# Altium PCB PMW3329_Connector.PcbDoc
Units mm, origin at the board's own origin, x right, y up, seen from the top; angles counter-clockwise.
Board outline 22.5 x 22.5 mm, 2 copper layers (Top Layer, Bottom Layer); 3 components, 9 nets, 24 pads, 0 vias.
Unrouted connection lines stored in the file: 13.
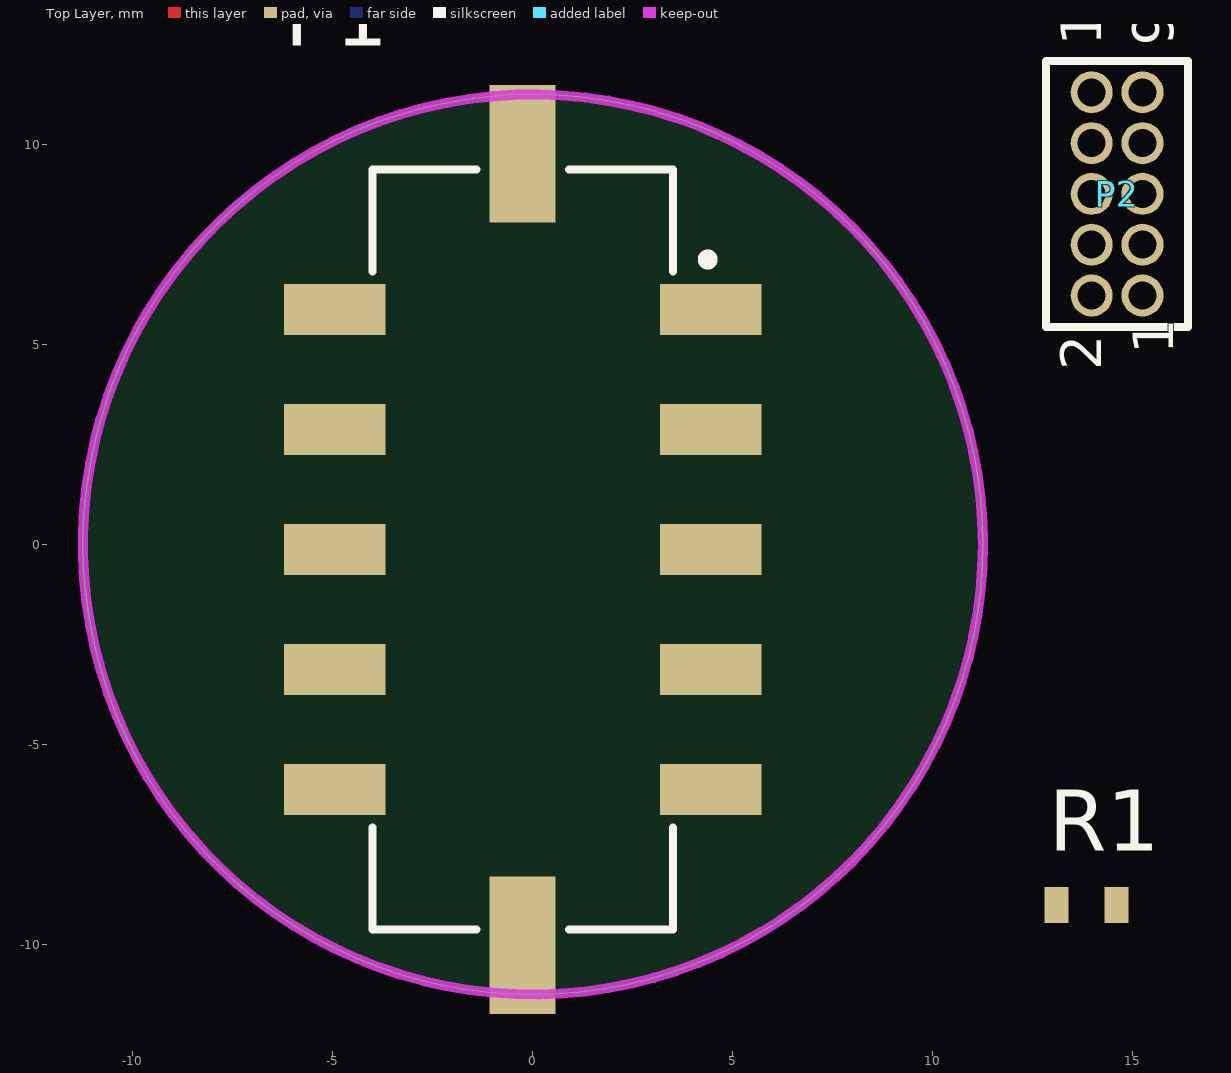
[diagram p0: Top Layer view]
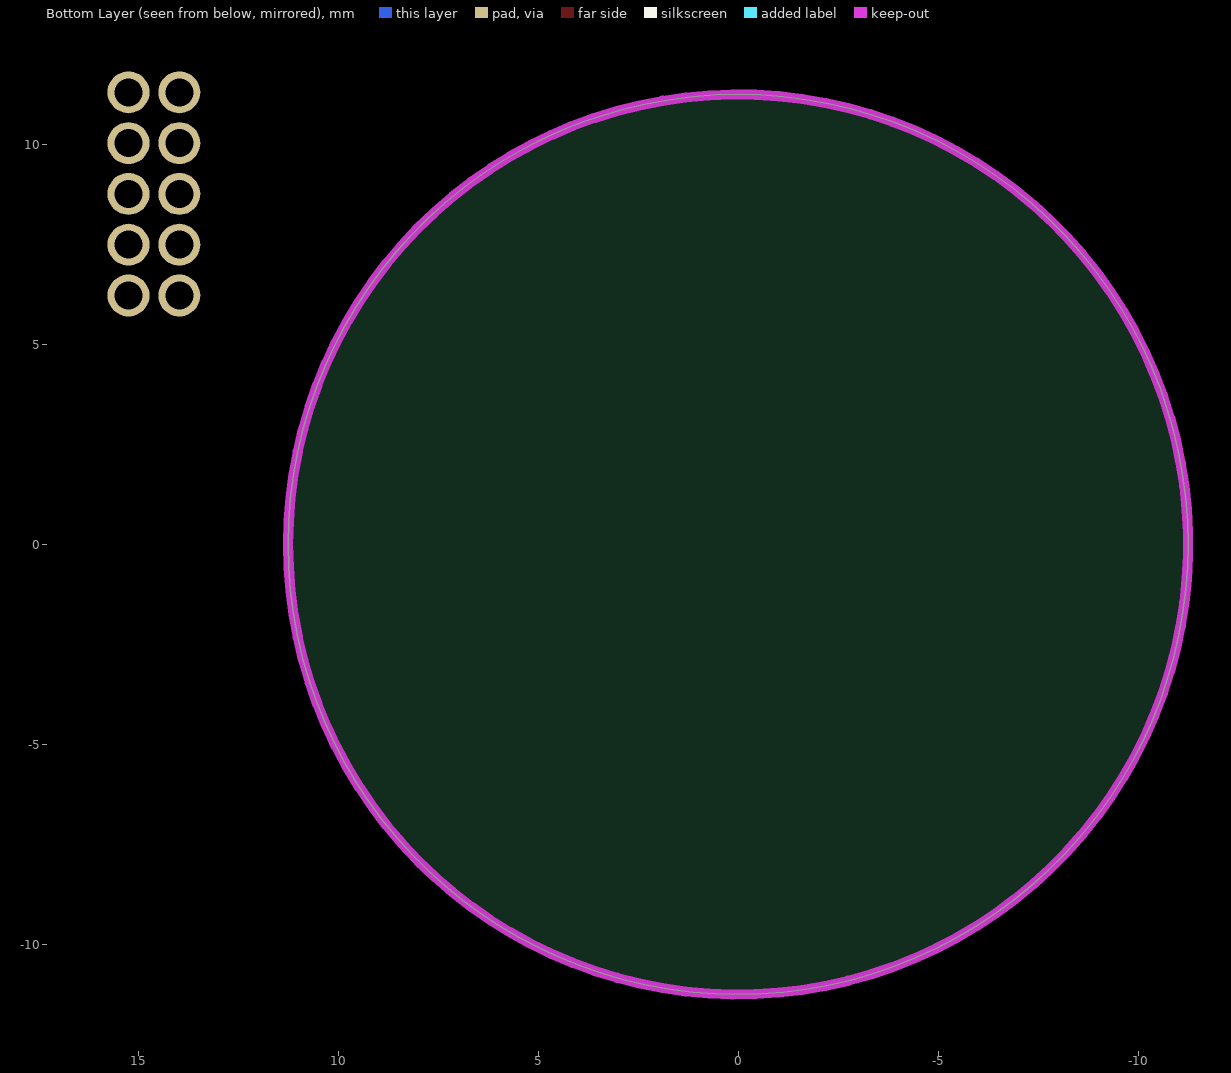
[diagram p1: Bottom Layer view, seen from below]

## Layer stack, top to bottom
Top Solder: solder mask 0.0102, Solder Resist, Dk 3.5
Top Layer: signal copper 0.0356
Dielectric 1: dielectric 0.32, FR-4, Dk 4.8
Bottom Layer: signal copper 0.0356
Bottom Solder: solder mask 0.0102, Solder Resist, Dk 3.5

## Board outline
-11.25,0 ccw(c0,0) 0,-11.25 ccw(c0,0) 11.25,0 ccw(c0,0) 0,11.25 ccw(c0,0)

## Design rules (kind name [scope] priority, off if disabled: settings)
Clearance [All] p1: gap=0.254 ignorepadtopadclearanceinfootprint=FALSE except(0: Arc-Hole Track-Hole SMDPad-Hole THPad-Hole Via-Hole Fill-Hole Poly-Hole Region-Hole Text-Hole)
PolygonConnect [All] p1: connectstyle=Relief reliefconductorwidth=0.254 reliefentries=4 polygonreliefangle="90 Angle" airgapwidth=0.254
RoutingVias [All] p1: holewidth=0.711 width=1.27 viastyle="Through Hole" minholewidth=0.711 minwidth=1.27 maxholewidth=0.711 maxwidth=1.27
SolderMaskExpansion [All] p1: expansion=0.102 istentingtop=FALSE
Width [All] p1: maxlimit=0.254 minlimit=0.254 preferedwidth=0.254
30 further rules are at their usual default settings.

## Components (designator, comment, footprint, x,y, rotation, side; value= is the part's Value field where it differs from the comment)
P1 "662010231822" 662010231822 -0.254,-0.127 r90 top
P2 "62201021121" 62201021121 14.605,8.763 r90 top
R1 "CPF-A-0603B100KE1" R0603 13.843,-9.017 r0 top value=10K

## Footprints (in the part's own frame and the unit in brackets; to place one, negate y for a bottom-side part, rotate by r counter-clockwise, add the part's x,y. Pads: shape width x height; smd on the part's side, far side on the other; paste and mask are expansions set on the pad)
62201021121 [mm] "Pin Header, pitch 1.27 mm, THT, Vertical, dual row, 10p"
  round 1.05 hole 0.7: 1(-2.54,-0.635) 2(-2.54,0.635) 3(-1.27,-0.635) 4(-1.27,0.635) 5(0,-0.635) 6(0,0.635) 7(1.27,-0.635) 8(1.27,0.635) 9(2.54,-0.635) 10(2.54,0.635)
  silkscreen extent -3.32,-1.78 3.32,1.78, body extent -3.17,-1.7 3.18,1.7, height 5.33
662010231822 [mm] "3.00mm SMT Male Dual Row Vertical Header with SMT Solder Tab, 10p"
  rect 1.27x2.54 smd: 1(6,-4.7) 2(3,-4.7) 3(0,-4.7) 4(-3,-4.7) 5(-6,-4.7) 6(6,4.7) 7(3,4.7) 8(0,4.7) 9(-3,4.7) 10(-6,4.7)
  rect 3.43x1.65 smd: MP1(-9.895,0) MP2(9.895,0)
  silkscreen extent -9.5,-4.75 9.5,3.76, body extent -11.6,-5.7 11.6,5.7, height 9.93
R0603 [mm]
  rect 0.6x0.9 smd: 1(-0.75,0) 2(0.75,0)
  body extent -0.8,-0.45 0.8,0.45, height 0.5

## Part data
P1: "SMT Male Header WR-MPC3, with SMT Solder Tabs, Vertical, Dual Row, pitch 3 mm, 10 pins", Contact Resistance="10 mOhm", Operating Temperature="-40 to 105 degC", Working Voltage="250 VAC", ComponentLink1Description=Manufacturer, ComponentLink1URL=http://www.we-online.de, ComponentLink2Description=Datasheet, ComponentLink2URL=https://katalog.we-online.de/em/datasheet/6620xx231822.pdf, Gender=Male, Mounting Technology=SMT, Orientation=Vertical, Packaging=Tray, Part Number=662010231822, Pin Number=10, Pitch="3 mm", Published Date="September 2018", Publisher="Wurth Elektronik"
P2: "WR-PHD Pin Header, THT, pitch 1.27mm, Dual Row, Vertical, 10p", Contact Resistance=20mOhm, Manufacturer="Wurth Elektronik", Operating Temperature="-40 to +105degC", Rated Current=1A, Withstanding Voltage=500VAC, Working Voltage=100VAC, ComponentLink1Description=Manufacturer, ComponentLink1URL=http://www.we-online.de, ComponentLink2Description=Datasheet, ComponentLink2URL=https://www.we-online.com/catalog/datasheet/62201021121.pdf, Gender="Pin Header", Manufacturer Part Number=62201021121, Mounting Technology=THT, Orientation=Vertical, Packaging=Box, Pin Number=10, Pitch=1.27mm, Published Date="May 2020", Row Number=Dual
R1: "Pullup MISO.", Parameter 1="R 0603 10K 0.1W 1%"

## Nets (pads, with @x,y where several pads share a name; then routed paths per layer and width w, separated by ;. In a path a pad name is that pad's centre, name@x,y a point inside that pad or via, vN(x,y) a via of type N, cw(c..) or ccw(c..) an arc to the next point about the centre after c; other vN are vias at no path point)
1V9: P1.6 P2.2
3V3: P1.7 P2.4 R1.1
GND: P1.9 P1.10 P2.8 P2.10
MOSI: P1.3 P2.5
MOTION: P1.5 P2.9
NCS: P1.1 P2.1
NetP1_2: P1.2 P2.3 R1.2
NRESET: P1.8 P2.6
SCLK: P1.4 P2.7
pads on no net: P1.MP1 P1.MP2

## Keep-outs
Keep-Out Layer:
  circle w0.254: c0,0 r11.25

## Text inside footprints (layer, text, board x,y; h text height)
P2: Top Overlay "9" at 16.005,12.468 h1.02 r90; Top Overlay "10" at 14.205,12.468 h1.02 r90; Top Overlay "1" at 16.005,4.758 h1.02 r90; Top Overlay "2" at 14.205,4.358 h1.02 r90